# Altium PCB Panel.PcbDoc (part 1 of 2)
Units mil, origin at the board's own origin, x right, y up, seen from the top; angles counter-clockwise.
Board outline 2975 x 8550 mil, 2 copper layers (Top Layer, Bottom Layer); 208 components, 76 nets, 352 pads, 184 vias.
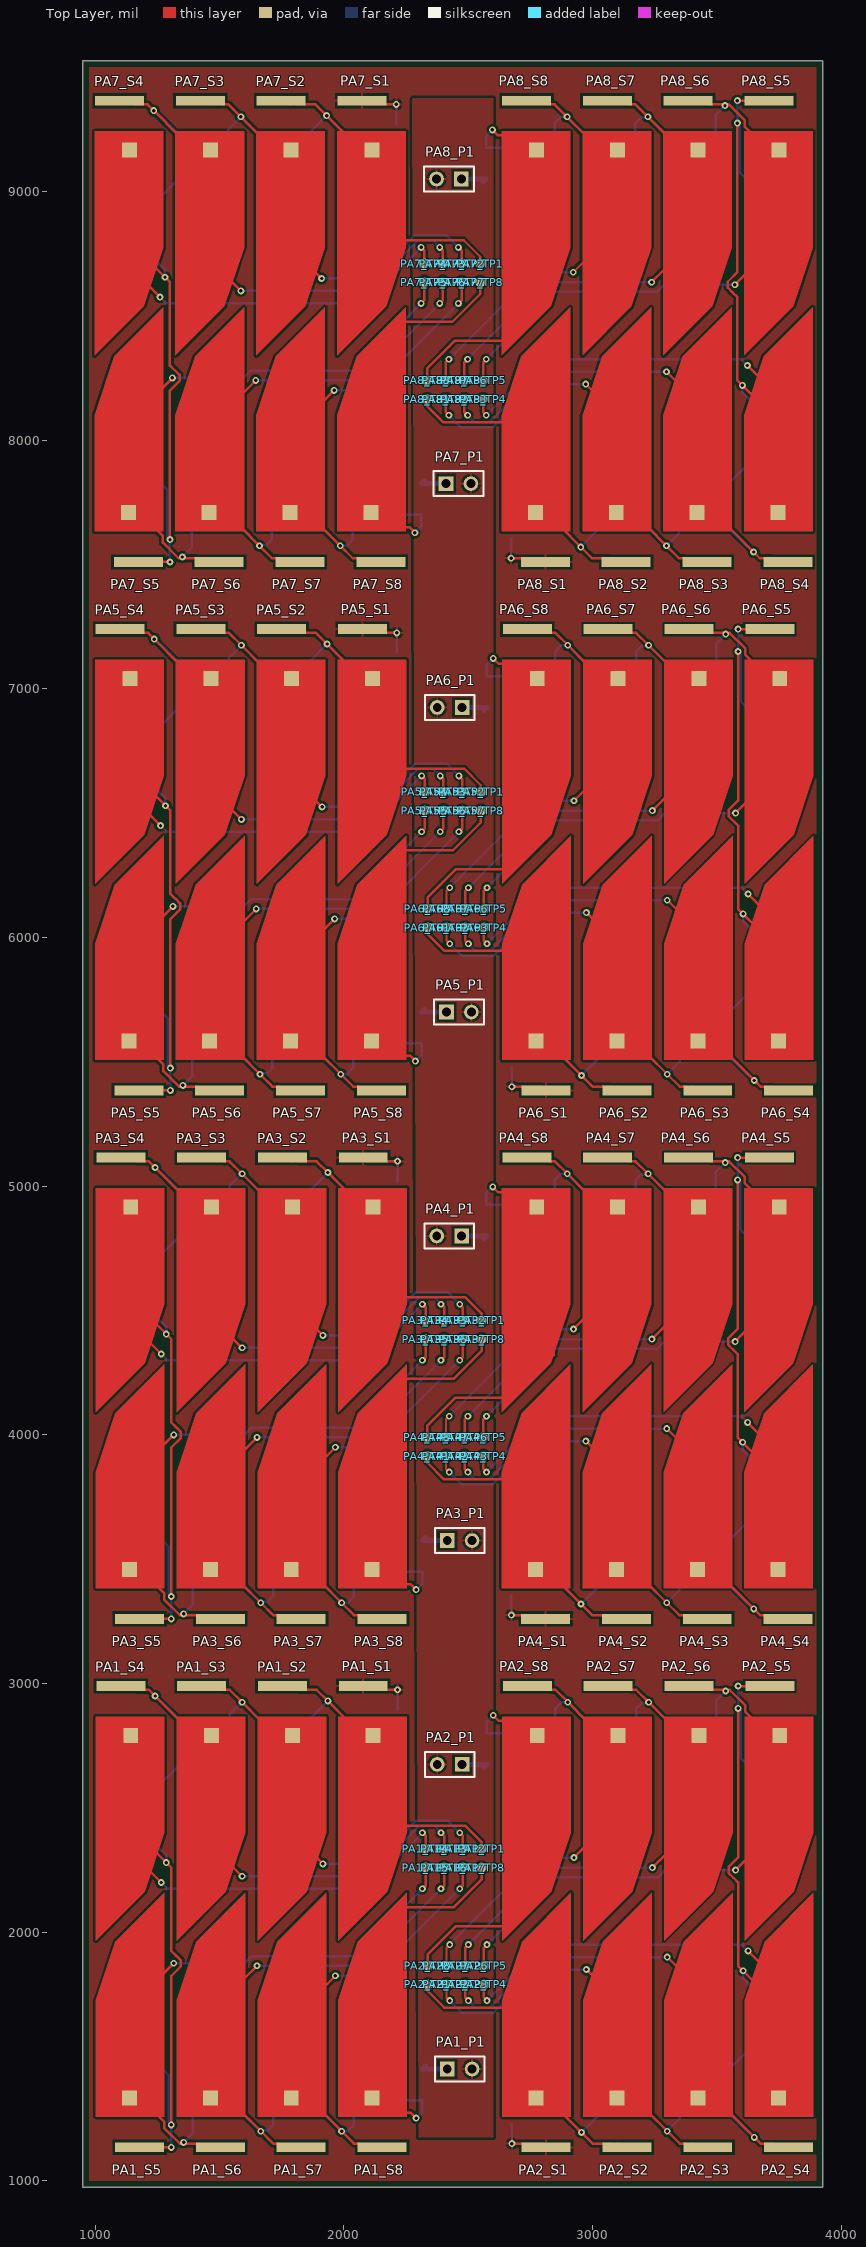
[diagram p0: Top Layer view]
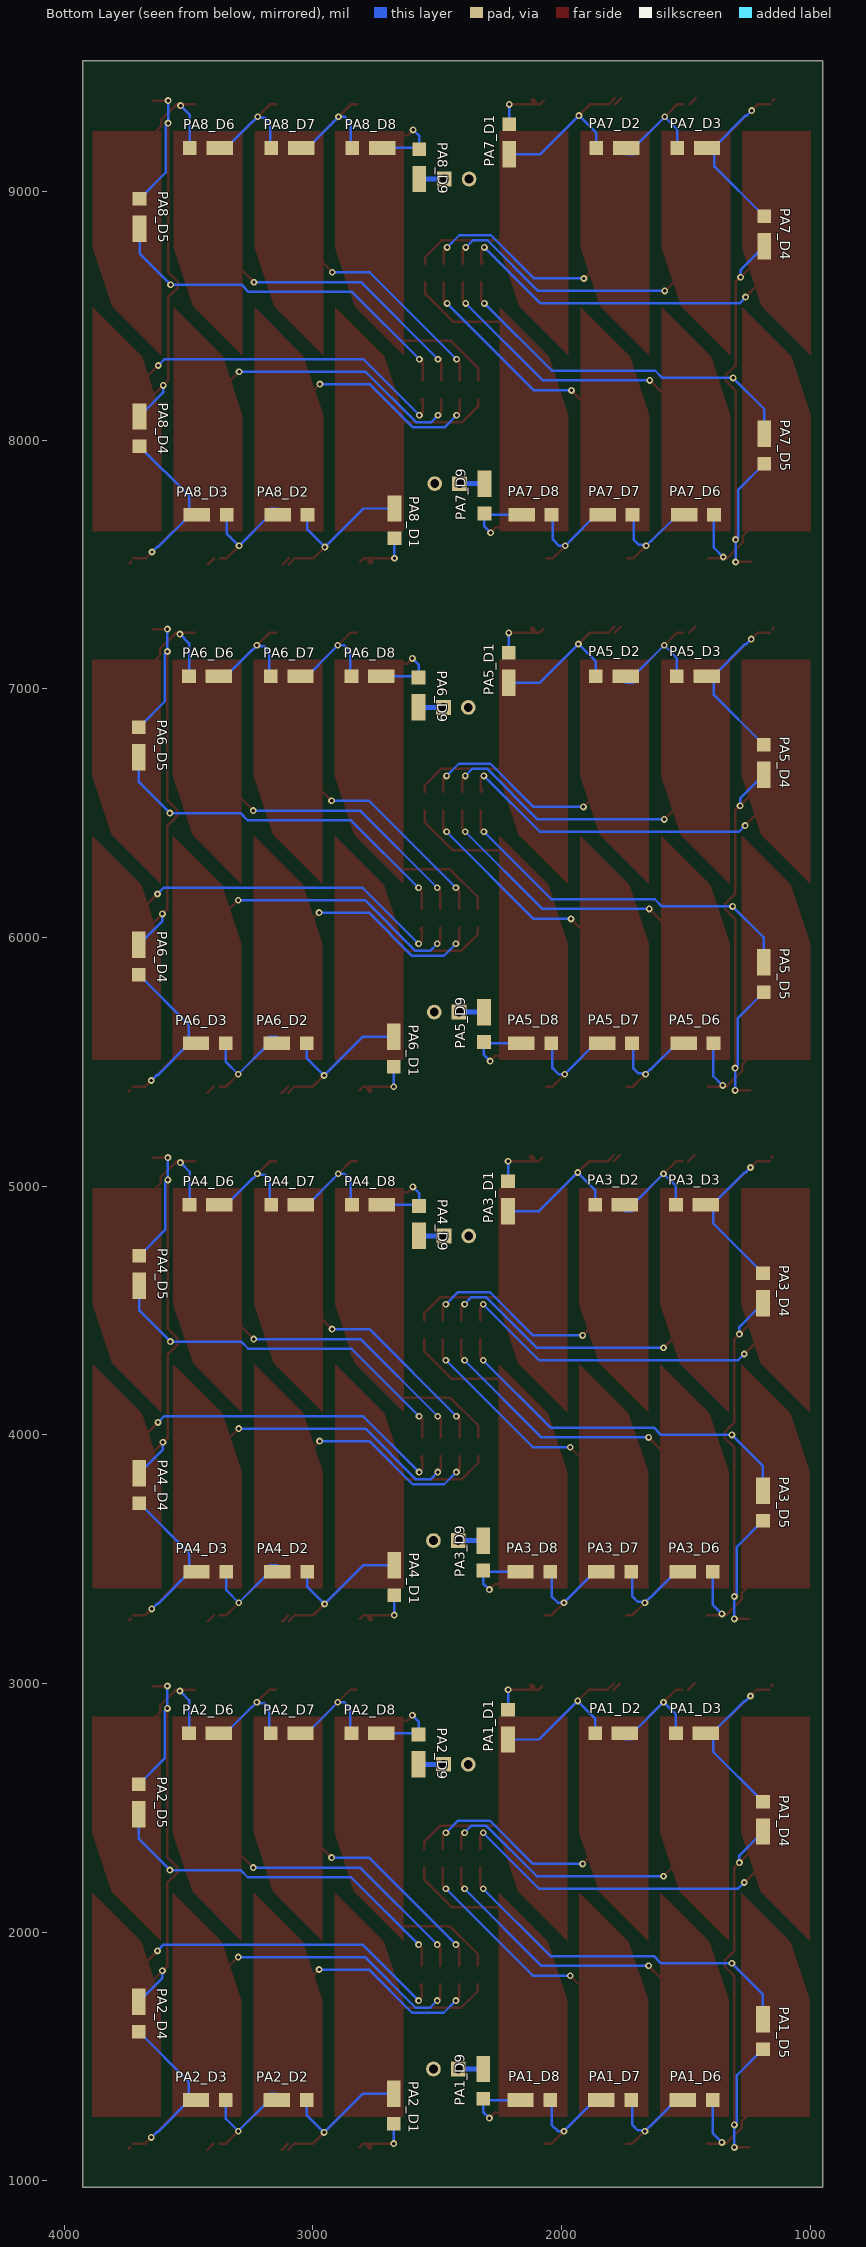
[diagram p1: Bottom Layer view, seen from below]

## Layer stack, top to bottom
Top Solder: solder mask 0.4, Solder Resist, Dk 3.5
Top Layer: signal copper 1.4
Dielectric 1: dielectric 12.6, FR-4, Dk 4.8
Bottom Layer: signal copper 1.4
Bottom Solder: solder mask 0.4, Solder Resist, Dk 3.5

## Board outline
950,9525 950,975 3925,975 3925,1000 3925,9525

## Design rules (kind name [scope] priority, off if disabled: settings)
Clearance [All] p1: gap=10 ignorepadtopadclearanceinfootprint=TRUE except(0: Arc-Hole Track-Hole SMDPad-Hole THPad-Hole Via-Hole Fill-Hole Poly-Hole Region-Hole Text-Hole)
ComponentClearance [All] p1: gap=0 collisioncheckmode=3 verticalgap=0 showdistances=FALSE
PolygonConnect [All] p1: connectstyle=Relief reliefconductorwidth=10 reliefentries=4 polygonreliefangle="90 Angle" airgapwidth=10
RoomDefinition PA1 [InComponentClass('PA1')] p1: confinementstyle=ConfineIn formatcopy=FALSE lockcomponents=FALSE outline 1000,1955.08 1000,3125 2271.45,3125 2271.45,3027.8 2271.58,2460 2600.22,2460 2600.22,2150 2273.92,1955.08 2273.92,1526 2600.22,1524.78 2600.22,1223 2273.92,1223 2273.92,1000 1002.47,1000 1002.47,1955.08
RoomDefinition PA3 [InComponentClass('PA3')] p2: confinementstyle=ConfineIn formatcopy=FALSE lockcomponents=FALSE outline 1000,4080.08 1000,5250 2271.45,5250 2271.45,5152.8 2271.58,4585 2600.22,4585 2600.22,4275 2273.92,4080.08 2273.92,3651 2600.22,3649.78 2600.22,3348 2273.92,3348 2273.92,3125 1002.47,3125 1002.47,4080.08
RoomDefinition PA8 [InComponentClass('PA8')] p3: confinementstyle=ConfineIn formatcopy=TRUE lockcomponents=FALSE outline 3887.22,8544.92 3887.22,7375 2615.78,7375 2615.78,7472.2 2615.65,8040 2287,8040 2287,8350 2613.31,8544.92 2613.31,8974 2287,8975.23 2287,9277 2613.31,9277 2613.31,9500 3884.75,9500 3884.75,8544.92
RoomDefinition PA7 [InComponentClass('PA7')] p4: confinementstyle=ConfineIn formatcopy=FALSE lockcomponents=FALSE outline 995,8330.08 995,9500 2266.45,9500 2266.45,9402.8 2266.58,8835 2595.22,8835 2595.22,8525 2268.92,8330.08 2268.92,7901 2595.22,7899.77 2595.22,7598 2268.92,7598 2268.92,7375 997.47,7375 997.47,8330.08
RoomDefinition PA6 [InComponentClass('PA6')] p5: confinementstyle=ConfineIn formatcopy=TRUE lockcomponents=FALSE outline 3890.22,6419.92 3890.22,5250 2618.78,5250 2618.78,5347.2 2618.65,5915 2290,5915 2290,6225 2616.31,6419.92 2616.31,6849 2290,6850.23 2290,7152 2616.31,7152 2616.31,7375 3887.75,7375 3887.75,6419.92
RoomDefinition PA5 [InComponentClass('PA5')] p6: confinementstyle=ConfineIn formatcopy=FALSE lockcomponents=FALSE outline 997,6205.08 997,7375 2268.45,7375 2268.45,7277.8 2268.58,6710 2597.22,6710 2597.22,6400 2270.92,6205.08 2270.92,5776 2597.22,5774.77 2597.22,5473 2270.92,5473 2270.92,5250 999.47,5250 999.47,6205.08
RoomDefinition PA4 [InComponentClass('PA4')] p7: confinementstyle=ConfineIn formatcopy=TRUE lockcomponents=FALSE outline 3888.22,4294.92 3888.22,3125 2616.78,3125 2616.78,3222.2 2616.65,3790 2288,3790 2288,4100 2614.31,4294.92 2614.31,4724 2288,4725.23 2288,5027 2614.31,5027 2614.31,5250 3885.75,5250 3885.75,4294.92
RoomDefinition PA2 [InComponentClass('PA2')] p8: confinementstyle=ConfineIn formatcopy=TRUE lockcomponents=FALSE outline 3890.22,2169.92 3890.22,1000 2618.78,1000 2618.78,1097.2 2618.65,1665 2290,1665 2290,1975 2616.31,2169.92 2616.31,2599 2290,2600.22 2290,2902 2616.31,2902 2616.31,3125 3887.75,3125 3887.75,2169.92
RoutingVias [All] p1: holewidth=28 width=50 viastyle="Through Hole" minholewidth=28 minwidth=50 maxholewidth=28 maxwidth=50
SolderMaskExpansion [All] p1: expansion=4
Width [All] p1: maxlimit=20 minlimit=10 preferedwidth=10 minimp=50.000000 maximp=50.000000 favimp=50.000000
29 further rules are at their usual default settings.

## Classes and differential pairs
component class PA8: PA8_D1 PA8_D2 PA8_D3 PA8_D4 PA8_D5 PA8_D6 PA8_D7 PA8_D8 PA8_D9 PA8_P1 PA8_S1 PA8_S2 PA8_S3 PA8_S4 PA8_S5 PA8_S6 PA8_S7 PA8_S8 PA8_TP1 PA8_TP2 PA8_TP3 PA8_TP4 PA8_TP5 PA8_TP6 PA8_TP7 PA8_TP8
component class PA7: PA7_D1 PA7_D2 PA7_D3 PA7_D4 PA7_D5 PA7_D6 PA7_D7 PA7_D8 PA7_D9 PA7_P1 PA7_S1 PA7_S2 PA7_S3 PA7_S4 PA7_S5 PA7_S6 PA7_S7 PA7_S8 PA7_TP1 PA7_TP2 PA7_TP3 PA7_TP4 PA7_TP5 PA7_TP6 PA7_TP7 PA7_TP8
component class PA6: PA6_D1 PA6_D2 PA6_D3 PA6_D4 PA6_D5 PA6_D6 PA6_D7 PA6_D8 PA6_D9 PA6_P1 PA6_S1 PA6_S2 PA6_S3 PA6_S4 PA6_S5 PA6_S6 PA6_S7 PA6_S8 PA6_TP1 PA6_TP2 PA6_TP3 PA6_TP4 PA6_TP5 PA6_TP6 PA6_TP7 PA6_TP8
channel class Row: PA1 PA2 PA3 PA4 PA5 PA6 PA7 PA8 PA9 PA10 PA11 PA12
component class PA5: PA5_D1 PA5_D2 PA5_D3 PA5_D4 PA5_D5 PA5_D6 PA5_D7 PA5_D8 PA5_D9 PA5_P1 PA5_S1 PA5_S2 PA5_S3 PA5_S4 PA5_S5 PA5_S6 PA5_S7 PA5_S8 PA5_TP1 PA5_TP2 PA5_TP3 PA5_TP4 PA5_TP5 PA5_TP6 PA5_TP7 PA5_TP8
component class PA4: PA4_D1 PA4_D2 PA4_D3 PA4_D4 PA4_D5 PA4_D6 PA4_D7 PA4_D8 PA4_D9 PA4_P1 PA4_S1 PA4_S2 PA4_S3 PA4_S4 PA4_S5 PA4_S6 PA4_S7 PA4_S8 PA4_TP1 PA4_TP2 PA4_TP3 PA4_TP4 PA4_TP5 PA4_TP6 PA4_TP7 PA4_TP8
component class PA3: PA3_D1 PA3_D2 PA3_D3 PA3_D4 PA3_D5 PA3_D6 PA3_D7 PA3_D8 PA3_D9 PA3_P1 PA3_S1 PA3_S2 PA3_S3 PA3_S4 PA3_S5 PA3_S6 PA3_S7 PA3_S8 PA3_TP1 PA3_TP2 PA3_TP3 PA3_TP4 PA3_TP5 PA3_TP6 PA3_TP7 PA3_TP8
component class PA2: PA2_D1 PA2_D2 PA2_D3 PA2_D4 PA2_D5 PA2_D6 PA2_D7 PA2_D8 PA2_D9 PA2_P1 PA2_S1 PA2_S2 PA2_S3 PA2_S4 PA2_S5 PA2_S6 PA2_S7 PA2_S8 PA2_TP1 PA2_TP2 PA2_TP3 PA2_TP4 PA2_TP5 PA2_TP6 PA2_TP7 PA2_TP8
component class PA1: PA1_D1 PA1_D2 PA1_D3 PA1_D4 PA1_D5 PA1_D6 PA1_D7 PA1_D8 PA1_D9 PA1_P1 PA1_S1 PA1_S2 PA1_S3 PA1_S4 PA1_S5 PA1_S6 PA1_S7 PA1_S8 PA1_TP1 PA1_TP2 PA1_TP3 PA1_TP4 PA1_TP5 PA1_TP6 PA1_TP7 PA1_TP8

## Components (designator, comment, footprint, x,y, rotation, side; value= is the part's Value field where it differs from the comment)
PA1_D1 "SCHOTTKY_DIODE_B120-FDICT-NDSCHOTTKY_DIODE_B120-FDICT-ND" SB_DIODE 2215.22,2822.24 r90 bottom (schematic designator D1)
PA1_D2 "SCHOTTKY_DIODE_B120-FDICT-NDSCHOTTKY_DIODE_B120-FDICT-ND" SB_DIODE 1792.39,2800 r0 bottom (schematic designator D2)
PA1_D3 "SCHOTTKY_DIODE_B120-FDICT-NDSCHOTTKY_DIODE_B120-FDICT-ND" SB_DIODE 1467.39,2800 r0 bottom (schematic designator D3)
PA1_D4 "SCHOTTKY_DIODE_B120-FDICT-NDSCHOTTKY_DIODE_B120-FDICT-ND" SB_DIODE 1190.22,2452.17 r90 bottom (schematic designator D4)
PA1_D5 "SCHOTTKY_DIODE_B120-FDICT-NDSCHOTTKY_DIODE_B120-FDICT-ND" SB_DIODE 1190.22,1602.76 r270 bottom (schematic designator D5)
PA1_D6 "SCHOTTKY_DIODE_B120-FDICT-NDSCHOTTKY_DIODE_B120-FDICT-ND" SB_DIODE 1465.22,1325 r180 bottom (schematic designator D6)
PA1_D7 "SCHOTTKY_DIODE_B120-FDICT-NDSCHOTTKY_DIODE_B120-FDICT-ND" SB_DIODE 1792.98,1325 r180 bottom (schematic designator D7)
PA1_D8 "SCHOTTKY_DIODE_B120-FDICT-NDSCHOTTKY_DIODE_B120-FDICT-ND" SB_DIODE 2117.99,1325 r180 bottom (schematic designator D8)
PA1_D9 "SCHOTTKY_DIODE_B120-FDICT-NDSCHOTTKY_DIODE_B120-FDICT-ND" SB_DIODE 2315.22,1402.76 r270 bottom (schematic designator D9)
PA1_P1 "Header 2" HDR1X2 2415.22,1450 r0 top (schematic designator P1)
PA1_S1 "SOLAR_CELL" SOLAR_CELL 1977.42,1966.34 r0 top (schematic designator S1)
PA1_S2 "SOLAR_CELL" SOLAR_CELL 1652.42,1966.34 r0 top (schematic designator S2)
PA1_S3 "SOLAR_CELL" SOLAR_CELL 1327.42,1966.34 r0 top (schematic designator S3)
PA1_S4 "SOLAR_CELL" SOLAR_CELL 1002.42,1966.34 r0 top (schematic designator S4)
PA1_S5 "SOLAR_CELL" SOLAR_CELL 1278.03,2158.66 r180 top (schematic designator S5)
PA1_S6 "SOLAR_CELL" SOLAR_CELL 1603.03,2158.66 r180 top (schematic designator S6)
PA1_S7 "SOLAR_CELL" SOLAR_CELL 1928.03,2158.66 r180 top (schematic designator S7)
PA1_S8 "SOLAR_CELL" SOLAR_CELL 2253.03,2158.66 r180 top (schematic designator S8)
PA1_TP1 "TEST_POINT" TEST_POINT 2553.03,2335.04 r90 top (schematic designator TP1)
PA1_TP2 "TEST_POINT" TEST_POINT 2478.03,2335.04 r90 top (schematic designator TP2)
PA1_TP3 "TEST_POINT" TEST_POINT 2403.03,2335.04 r90 top (schematic designator TP3)
PA1_TP4 "TEST_POINT" TEST_POINT 2328.03,2335.04 r90 top (schematic designator TP4)
PA1_TP5 "TEST_POINT" TEST_POINT 2328.03,2260.04 r90 top (schematic designator TP5)
PA1_TP6 "TEST_POINT" TEST_POINT 2403.03,2260.04 r90 top (schematic designator TP6)
PA1_TP7 "TEST_POINT" TEST_POINT 2478.03,2260.04 r90 top (schematic designator TP7)
PA1_TP8 "TEST_POINT" TEST_POINT 2553.03,2260.04 r90 top (schematic designator TP8)
PA2_D1 "SCHOTTKY_DIODE_B120-FDICT-NDSCHOTTKY_DIODE_B120-FDICT-ND" SB_DIODE 2675,1302.76 r270 bottom (schematic designator D1)
PA2_D2 "SCHOTTKY_DIODE_B120-FDICT-NDSCHOTTKY_DIODE_B120-FDICT-ND" SB_DIODE 3097.83,1325 r180 bottom (schematic designator D2)
PA2_D3 "SCHOTTKY_DIODE_B120-FDICT-NDSCHOTTKY_DIODE_B120-FDICT-ND" SB_DIODE 3422.83,1325 r180 bottom (schematic designator D3)
PA2_D4 "SCHOTTKY_DIODE_B120-FDICT-NDSCHOTTKY_DIODE_B120-FDICT-ND" SB_DIODE 3700,1672.83 r270 bottom (schematic designator D4)
PA2_D5 "SCHOTTKY_DIODE_B120-FDICT-NDSCHOTTKY_DIODE_B120-FDICT-ND" SB_DIODE 3700,2522.24 r90 bottom (schematic designator D5)
PA2_D6 "SCHOTTKY_DIODE_B120-FDICT-NDSCHOTTKY_DIODE_B120-FDICT-ND" SB_DIODE 3425,2800 r0 bottom (schematic designator D6)
PA2_D7 "SCHOTTKY_DIODE_B120-FDICT-NDSCHOTTKY_DIODE_B120-FDICT-ND" SB_DIODE 3097.24,2800 r0 bottom (schematic designator D7)
PA2_D8 "SCHOTTKY_DIODE_B120-FDICT-NDSCHOTTKY_DIODE_B120-FDICT-ND" SB_DIODE 2772.24,2800 r0 bottom (schematic designator D8)
PA2_D9 "SCHOTTKY_DIODE_B120-FDICT-NDSCHOTTKY_DIODE_B120-FDICT-ND" SB_DIODE 2575,2722.24 r90 bottom (schematic designator D9)
PA2_P1 "Header 2" HDR1X2 2475,2675 r180 top (schematic designator P1)
PA2_S1 "SOLAR_CELL" SOLAR_CELL 2912.8,2158.66 r180 top (schematic designator S1)
PA2_S2 "SOLAR_CELL" SOLAR_CELL 3237.8,2158.66 r180 top (schematic designator S2)
PA2_S3 "SOLAR_CELL" SOLAR_CELL 3562.8,2158.66 r180 top (schematic designator S3)
PA2_S4 "SOLAR_CELL" SOLAR_CELL 3887.8,2158.66 r180 top (schematic designator S4)
PA2_S5 "SOLAR_CELL" SOLAR_CELL 3612.2,1966.34 r0 top (schematic designator S5)
PA2_S6 "SOLAR_CELL" SOLAR_CELL 3287.2,1966.34 r0 top (schematic designator S6)
PA2_S7 "SOLAR_CELL" SOLAR_CELL 2962.2,1966.34 r0 top (schematic designator S7)
PA2_S8 "SOLAR_CELL" SOLAR_CELL 2637.2,1966.34 r0 top (schematic designator S8)
PA2_TP1 "TEST_POINT" TEST_POINT 2337.2,1789.96 r270 top (schematic designator TP1)
PA2_TP2 "TEST_POINT" TEST_POINT 2412.2,1789.96 r270 top (schematic designator TP2)
PA2_TP3 "TEST_POINT" TEST_POINT 2487.2,1789.96 r270 top (schematic designator TP3)
PA2_TP4 "TEST_POINT" TEST_POINT 2562.2,1789.96 r270 top (schematic designator TP4)
PA2_TP5 "TEST_POINT" TEST_POINT 2562.2,1864.96 r270 top (schematic designator TP5)
PA2_TP6 "TEST_POINT" TEST_POINT 2487.2,1864.96 r270 top (schematic designator TP6)
PA2_TP7 "TEST_POINT" TEST_POINT 2412.2,1864.96 r270 top (schematic designator TP7)
PA2_TP8 "TEST_POINT" TEST_POINT 2337.2,1864.96 r270 top (schematic designator TP8)
PA3_D1 "SCHOTTKY_DIODE_B120-FDICT-NDSCHOTTKY_DIODE_B120-FDICT-ND" SB_DIODE 2215.22,4947.24 r90 bottom (schematic designator D1)
PA3_D2 "SCHOTTKY_DIODE_B120-FDICT-NDSCHOTTKY_DIODE_B120-FDICT-ND" SB_DIODE 1792.39,4925 r0 bottom (schematic designator D2)
PA3_D3 "SCHOTTKY_DIODE_B120-FDICT-NDSCHOTTKY_DIODE_B120-FDICT-ND" SB_DIODE 1467.39,4925 r0 bottom (schematic designator D3)
PA3_D4 "SCHOTTKY_DIODE_B120-FDICT-NDSCHOTTKY_DIODE_B120-FDICT-ND" SB_DIODE 1190.22,4577.17 r90 bottom (schematic designator D4)
PA3_D5 "SCHOTTKY_DIODE_B120-FDICT-NDSCHOTTKY_DIODE_B120-FDICT-ND" SB_DIODE 1190.22,3727.76 r270 bottom (schematic designator D5)
PA3_D6 "SCHOTTKY_DIODE_B120-FDICT-NDSCHOTTKY_DIODE_B120-FDICT-ND" SB_DIODE 1465.22,3450 r180 bottom (schematic designator D6)
PA3_D7 "SCHOTTKY_DIODE_B120-FDICT-NDSCHOTTKY_DIODE_B120-FDICT-ND" SB_DIODE 1792.98,3450 r180 bottom (schematic designator D7)
PA3_D8 "SCHOTTKY_DIODE_B120-FDICT-NDSCHOTTKY_DIODE_B120-FDICT-ND" SB_DIODE 2117.99,3450 r180 bottom (schematic designator D8)
PA3_D9 "SCHOTTKY_DIODE_B120-FDICT-NDSCHOTTKY_DIODE_B120-FDICT-ND" SB_DIODE 2315.22,3527.76 r270 bottom (schematic designator D9)
PA3_P1 "Header 2" HDR1X2 2415.22,3575 r0 top (schematic designator P1)
PA3_S1 "SOLAR_CELL" SOLAR_CELL 1977.42,4091.34 r0 top (schematic designator S1)
PA3_S2 "SOLAR_CELL" SOLAR_CELL 1652.42,4091.34 r0 top (schematic designator S2)
PA3_S3 "SOLAR_CELL" SOLAR_CELL 1327.42,4091.34 r0 top (schematic designator S3)
PA3_S4 "SOLAR_CELL" SOLAR_CELL 1002.42,4091.34 r0 top (schematic designator S4)
PA3_S5 "SOLAR_CELL" SOLAR_CELL 1278.03,4283.66 r180 top (schematic designator S5)
PA3_S6 "SOLAR_CELL" SOLAR_CELL 1603.03,4283.66 r180 top (schematic designator S6)
PA3_S7 "SOLAR_CELL" SOLAR_CELL 1928.03,4283.66 r180 top (schematic designator S7)
PA3_S8 "SOLAR_CELL" SOLAR_CELL 2253.03,4283.66 r180 top (schematic designator S8)
PA3_TP1 "TEST_POINT" TEST_POINT 2553.03,4460.04 r90 top (schematic designator TP1)
PA3_TP2 "TEST_POINT" TEST_POINT 2478.03,4460.04 r90 top (schematic designator TP2)
PA3_TP3 "TEST_POINT" TEST_POINT 2403.03,4460.04 r90 top (schematic designator TP3)
PA3_TP4 "TEST_POINT" TEST_POINT 2328.03,4460.04 r90 top (schematic designator TP4)
PA3_TP5 "TEST_POINT" TEST_POINT 2328.03,4385.04 r90 top (schematic designator TP5)
PA3_TP6 "TEST_POINT" TEST_POINT 2403.03,4385.04 r90 top (schematic designator TP6)
PA3_TP7 "TEST_POINT" TEST_POINT 2478.03,4385.04 r90 top (schematic designator TP7)
PA3_TP8 "TEST_POINT" TEST_POINT 2553.03,4385.04 r90 top (schematic designator TP8)
PA4_D1 "SCHOTTKY_DIODE_B120-FDICT-NDSCHOTTKY_DIODE_B120-FDICT-ND" SB_DIODE 2673,3427.76 r270 bottom (schematic designator D1)
PA4_D2 "SCHOTTKY_DIODE_B120-FDICT-NDSCHOTTKY_DIODE_B120-FDICT-ND" SB_DIODE 3095.83,3450 r180 bottom (schematic designator D2)
PA4_D3 "SCHOTTKY_DIODE_B120-FDICT-NDSCHOTTKY_DIODE_B120-FDICT-ND" SB_DIODE 3420.83,3450 r180 bottom (schematic designator D3)
PA4_D4 "SCHOTTKY_DIODE_B120-FDICT-NDSCHOTTKY_DIODE_B120-FDICT-ND" SB_DIODE 3698,3797.83 r270 bottom (schematic designator D4)
PA4_D5 "SCHOTTKY_DIODE_B120-FDICT-NDSCHOTTKY_DIODE_B120-FDICT-ND" SB_DIODE 3698,4647.24 r90 bottom (schematic designator D5)
PA4_D6 "SCHOTTKY_DIODE_B120-FDICT-NDSCHOTTKY_DIODE_B120-FDICT-ND" SB_DIODE 3423,4925 r0 bottom (schematic designator D6)
PA4_D7 "SCHOTTKY_DIODE_B120-FDICT-NDSCHOTTKY_DIODE_B120-FDICT-ND" SB_DIODE 3095.24,4925 r0 bottom (schematic designator D7)
PA4_D8 "SCHOTTKY_DIODE_B120-FDICT-NDSCHOTTKY_DIODE_B120-FDICT-ND" SB_DIODE 2770.24,4925 r0 bottom (schematic designator D8)
PA4_D9 "SCHOTTKY_DIODE_B120-FDICT-NDSCHOTTKY_DIODE_B120-FDICT-ND" SB_DIODE 2573,4847.24 r90 bottom (schematic designator D9)
PA4_P1 "Header 2" HDR1X2 2473,4800 r180 top (schematic designator P1)
PA4_S1 "SOLAR_CELL" SOLAR_CELL 2910.8,4283.66 r180 top (schematic designator S1)
PA4_S2 "SOLAR_CELL" SOLAR_CELL 3235.8,4283.66 r180 top (schematic designator S2)
PA4_S3 "SOLAR_CELL" SOLAR_CELL 3560.8,4283.66 r180 top (schematic designator S3)
PA4_S4 "SOLAR_CELL" SOLAR_CELL 3885.8,4283.66 r180 top (schematic designator S4)
PA4_S5 "SOLAR_CELL" SOLAR_CELL 3610.2,4091.34 r0 top (schematic designator S5)
PA4_S6 "SOLAR_CELL" SOLAR_CELL 3285.2,4091.34 r0 top (schematic designator S6)
PA4_S7 "SOLAR_CELL" SOLAR_CELL 2960.2,4091.34 r0 top (schematic designator S7)
PA4_S8 "SOLAR_CELL" SOLAR_CELL 2635.2,4091.34 r0 top (schematic designator S8)
PA4_TP1 "TEST_POINT" TEST_POINT 2335.2,3914.96 r270 top (schematic designator TP1)
PA4_TP2 "TEST_POINT" TEST_POINT 2410.2,3914.96 r270 top (schematic designator TP2)
PA4_TP3 "TEST_POINT" TEST_POINT 2485.2,3914.96 r270 top (schematic designator TP3)
PA4_TP4 "TEST_POINT" TEST_POINT 2560.2,3914.96 r270 top (schematic designator TP4)
PA4_TP5 "TEST_POINT" TEST_POINT 2560.2,3989.96 r270 top (schematic designator TP5)
PA4_TP6 "TEST_POINT" TEST_POINT 2485.2,3989.96 r270 top (schematic designator TP6)
PA4_TP7 "TEST_POINT" TEST_POINT 2410.2,3989.96 r270 top (schematic designator TP7)
PA4_TP8 "TEST_POINT" TEST_POINT 2335.2,3989.96 r270 top (schematic designator TP8)
PA5_D1 "SCHOTTKY_DIODE_B120-FDICT-NDSCHOTTKY_DIODE_B120-FDICT-ND" SB_DIODE 2212.22,7072.24 r90 bottom (schematic designator D1)
PA5_D2 "SCHOTTKY_DIODE_B120-FDICT-NDSCHOTTKY_DIODE_B120-FDICT-ND" SB_DIODE 1789.39,7050 r0 bottom (schematic designator D2)
PA5_D3 "SCHOTTKY_DIODE_B120-FDICT-NDSCHOTTKY_DIODE_B120-FDICT-ND" SB_DIODE 1464.39,7050 r0 bottom (schematic designator D3)
PA5_D4 "SCHOTTKY_DIODE_B120-FDICT-NDSCHOTTKY_DIODE_B120-FDICT-ND" SB_DIODE 1187.22,6702.17 r90 bottom (schematic designator D4)
PA5_D5 "SCHOTTKY_DIODE_B120-FDICT-NDSCHOTTKY_DIODE_B120-FDICT-ND" SB_DIODE 1187.22,5852.76 r270 bottom (schematic designator D5)
PA5_D6 "SCHOTTKY_DIODE_B120-FDICT-NDSCHOTTKY_DIODE_B120-FDICT-ND" SB_DIODE 1462.22,5575 r180 bottom (schematic designator D6)
PA5_D7 "SCHOTTKY_DIODE_B120-FDICT-NDSCHOTTKY_DIODE_B120-FDICT-ND" SB_DIODE 1789.98,5575 r180 bottom (schematic designator D7)
PA5_D8 "SCHOTTKY_DIODE_B120-FDICT-NDSCHOTTKY_DIODE_B120-FDICT-ND" SB_DIODE 2114.99,5575 r180 bottom (schematic designator D8)
PA5_D9 "SCHOTTKY_DIODE_B120-FDICT-NDSCHOTTKY_DIODE_B120-FDICT-ND" SB_DIODE 2312.22,5652.76 r270 bottom (schematic designator D9)
PA5_P1 "Header 2" HDR1X2 2412.22,5700 r0 top (schematic designator P1)
PA5_S1 "SOLAR_CELL" SOLAR_CELL 1974.42,6216.34 r0 top (schematic designator S1)
PA5_S2 "SOLAR_CELL" SOLAR_CELL 1649.42,6216.34 r0 top (schematic designator S2)
PA5_S3 "SOLAR_CELL" SOLAR_CELL 1324.42,6216.34 r0 top (schematic designator S3)
PA5_S4 "SOLAR_CELL" SOLAR_CELL 999.42,6216.34 r0 top (schematic designator S4)
PA5_S5 "SOLAR_CELL" SOLAR_CELL 1275.03,6408.66 r180 top (schematic designator S5)
PA5_S6 "SOLAR_CELL" SOLAR_CELL 1600.03,6408.66 r180 top (schematic designator S6)
PA5_S7 "SOLAR_CELL" SOLAR_CELL 1925.03,6408.66 r180 top (schematic designator S7)
PA5_S8 "SOLAR_CELL" SOLAR_CELL 2250.03,6408.66 r180 top (schematic designator S8)
PA5_TP1 "TEST_POINT" TEST_POINT 2550.03,6585.04 r90 top (schematic designator TP1)
PA5_TP2 "TEST_POINT" TEST_POINT 2475.03,6585.04 r90 top (schematic designator TP2)
PA5_TP3 "TEST_POINT" TEST_POINT 2400.03,6585.04 r90 top (schematic designator TP3)
PA5_TP4 "TEST_POINT" TEST_POINT 2325.03,6585.04 r90 top (schematic designator TP4)
PA5_TP5 "TEST_POINT" TEST_POINT 2325.03,6510.04 r90 top (schematic designator TP5)
PA5_TP6 "TEST_POINT" TEST_POINT 2400.03,6510.04 r90 top (schematic designator TP6)
PA5_TP7 "TEST_POINT" TEST_POINT 2475.03,6510.04 r90 top (schematic designator TP7)
PA5_TP8 "TEST_POINT" TEST_POINT 2550.03,6510.04 r90 top (schematic designator TP8)
PA6_D1 "SCHOTTKY_DIODE_B120-FDICT-NDSCHOTTKY_DIODE_B120-FDICT-ND" SB_DIODE 2675,5552.76 r270 bottom (schematic designator D1)
PA6_D2 "SCHOTTKY_DIODE_B120-FDICT-NDSCHOTTKY_DIODE_B120-FDICT-ND" SB_DIODE 3097.83,5575 r180 bottom (schematic designator D2)
PA6_D3 "SCHOTTKY_DIODE_B120-FDICT-NDSCHOTTKY_DIODE_B120-FDICT-ND" SB_DIODE 3422.83,5575 r180 bottom (schematic designator D3)
PA6_D4 "SCHOTTKY_DIODE_B120-FDICT-NDSCHOTTKY_DIODE_B120-FDICT-ND" SB_DIODE 3700,5922.83 r270 bottom (schematic designator D4)
PA6_D5 "SCHOTTKY_DIODE_B120-FDICT-NDSCHOTTKY_DIODE_B120-FDICT-ND" SB_DIODE 3700,6772.24 r90 bottom (schematic designator D5)
PA6_D6 "SCHOTTKY_DIODE_B120-FDICT-NDSCHOTTKY_DIODE_B120-FDICT-ND" SB_DIODE 3425,7050 r0 bottom (schematic designator D6)
PA6_D7 "SCHOTTKY_DIODE_B120-FDICT-NDSCHOTTKY_DIODE_B120-FDICT-ND" SB_DIODE 3097.24,7050 r0 bottom (schematic designator D7)
PA6_D8 "SCHOTTKY_DIODE_B120-FDICT-NDSCHOTTKY_DIODE_B120-FDICT-ND" SB_DIODE 2772.24,7050 r0 bottom (schematic designator D8)
PA6_D9 "SCHOTTKY_DIODE_B120-FDICT-NDSCHOTTKY_DIODE_B120-FDICT-ND" SB_DIODE 2575,6972.24 r90 bottom (schematic designator D9)
PA6_P1 "Header 2" HDR1X2 2475,6925 r180 top (schematic designator P1)
PA6_S1 "SOLAR_CELL" SOLAR_CELL 2912.8,6408.66 r180 top (schematic designator S1)
PA6_S2 "SOLAR_CELL" SOLAR_CELL 3237.8,6408.66 r180 top (schematic designator S2)
PA6_S3 "SOLAR_CELL" SOLAR_CELL 3562.8,6408.66 r180 top (schematic designator S3)
PA6_S4 "SOLAR_CELL" SOLAR_CELL 3887.8,6408.66 r180 top (schematic designator S4)
PA6_S5 "SOLAR_CELL" SOLAR_CELL 3612.2,6216.34 r0 top (schematic designator S5)
PA6_S6 "SOLAR_CELL" SOLAR_CELL 3287.2,6216.34 r0 top (schematic designator S6)
PA6_S7 "SOLAR_CELL" SOLAR_CELL 2962.2,6216.34 r0 top (schematic designator S7)
PA6_S8 "SOLAR_CELL" SOLAR_CELL 2637.2,6216.34 r0 top (schematic designator S8)
PA6_TP1 "TEST_POINT" TEST_POINT 2337.2,6039.96 r270 top (schematic designator TP1)
PA6_TP2 "TEST_POINT" TEST_POINT 2412.2,6039.96 r270 top (schematic designator TP2)
PA6_TP3 "TEST_POINT" TEST_POINT 2487.2,6039.96 r270 top (schematic designator TP3)
PA6_TP4 "TEST_POINT" TEST_POINT 2562.2,6039.96 r270 top (schematic designator TP4)
PA6_TP5 "TEST_POINT" TEST_POINT 2562.2,6114.96 r270 top (schematic designator TP5)
PA6_TP6 "TEST_POINT" TEST_POINT 2487.2,6114.96 r270 top (schematic designator TP6)
PA6_TP7 "TEST_POINT" TEST_POINT 2412.2,6114.96 r270 top (schematic designator TP7)
PA6_TP8 "TEST_POINT" TEST_POINT 2337.2,6114.96 r270 top (schematic designator TP8)
PA7_D1 "SCHOTTKY_DIODE_B120-FDICT-NDSCHOTTKY_DIODE_B120-FDICT-ND" SB_DIODE 2210.22,9197.24 r90 bottom (schematic designator D1)
PA7_D2 "SCHOTTKY_DIODE_B120-FDICT-NDSCHOTTKY_DIODE_B120-FDICT-ND" SB_DIODE 1787.39,9175 r0 bottom (schematic designator D2)
PA7_D3 "SCHOTTKY_DIODE_B120-FDICT-NDSCHOTTKY_DIODE_B120-FDICT-ND" SB_DIODE 1462.39,9175 r0 bottom (schematic designator D3)
PA7_D4 "SCHOTTKY_DIODE_B120-FDICT-NDSCHOTTKY_DIODE_B120-FDICT-ND" SB_DIODE 1185.22,8827.17 r90 bottom (schematic designator D4)
PA7_D5 "SCHOTTKY_DIODE_B120-FDICT-NDSCHOTTKY_DIODE_B120-FDICT-ND" SB_DIODE 1185.22,7977.76 r270 bottom (schematic designator D5)
PA7_D6 "SCHOTTKY_DIODE_B120-FDICT-NDSCHOTTKY_DIODE_B120-FDICT-ND" SB_DIODE 1460.22,7700 r180 bottom (schematic designator D6)
PA7_D7 "SCHOTTKY_DIODE_B120-FDICT-NDSCHOTTKY_DIODE_B120-FDICT-ND" SB_DIODE 1787.98,7700 r180 bottom (schematic designator D7)
PA7_D8 "SCHOTTKY_DIODE_B120-FDICT-NDSCHOTTKY_DIODE_B120-FDICT-ND" SB_DIODE 2112.99,7700 r180 bottom (schematic designator D8)
PA7_D9 "SCHOTTKY_DIODE_B120-FDICT-NDSCHOTTKY_DIODE_B120-FDICT-ND" SB_DIODE 2310.22,7777.76 r270 bottom (schematic designator D9)
PA7_P1 "Header 2" HDR1X2 2410.22,7825 r0 top (schematic designator P1)
PA7_S1 "SOLAR_CELL" SOLAR_CELL 1972.42,8341.34 r0 top (schematic designator S1)
PA7_S2 "SOLAR_CELL" SOLAR_CELL 1647.42,8341.34 r0 top (schematic designator S2)
PA7_S3 "SOLAR_CELL" SOLAR_CELL 1322.42,8341.34 r0 top (schematic designator S3)
PA7_S4 "SOLAR_CELL" SOLAR_CELL 997.42,8341.34 r0 top (schematic designator S4)
PA7_S5 "SOLAR_CELL" SOLAR_CELL 1273.03,8533.66 r180 top (schematic designator S5)
PA7_S6 "SOLAR_CELL" SOLAR_CELL 1598.03,8533.66 r180 top (schematic designator S6)
PA7_S7 "SOLAR_CELL" SOLAR_CELL 1923.03,8533.66 r180 top (schematic designator S7)
PA7_S8 "SOLAR_CELL" SOLAR_CELL 2248.03,8533.66 r180 top (schematic designator S8)
PA7_TP1 "TEST_POINT" TEST_POINT 2548.03,8710.04 r90 top (schematic designator TP1)
PA7_TP2 "TEST_POINT" TEST_POINT 2473.03,8710.04 r90 top (schematic designator TP2)
PA7_TP3 "TEST_POINT" TEST_POINT 2398.03,8710.04 r90 top (schematic designator TP3)
PA7_TP4 "TEST_POINT" TEST_POINT 2323.03,8710.04 r90 top (schematic designator TP4)
PA7_TP5 "TEST_POINT" TEST_POINT 2323.03,8635.04 r90 top (schematic designator TP5)
PA7_TP6 "TEST_POINT" TEST_POINT 2398.03,8635.04 r90 top (schematic designator TP6)
PA7_TP7 "TEST_POINT" TEST_POINT 2473.03,8635.04 r90 top (schematic designator TP7)
PA7_TP8 "TEST_POINT" TEST_POINT 2548.03,8635.04 r90 top (schematic designator TP8)
PA8_D1 "SCHOTTKY_DIODE_B120-FDICT-NDSCHOTTKY_DIODE_B120-FDICT-ND" SB_DIODE 2672,7677.76 r270 bottom (schematic designator D1)
PA8_D2 "SCHOTTKY_DIODE_B120-FDICT-NDSCHOTTKY_DIODE_B120-FDICT-ND" SB_DIODE 3094.83,7700 r180 bottom (schematic designator D2)
PA8_D3 "SCHOTTKY_DIODE_B120-FDICT-NDSCHOTTKY_DIODE_B120-FDICT-ND" SB_DIODE 3419.83,7700 r180 bottom (schematic designator D3)
PA8_D4 "SCHOTTKY_DIODE_B120-FDICT-NDSCHOTTKY_DIODE_B120-FDICT-ND" SB_DIODE 3697,8047.83 r270 bottom (schematic designator D4)
PA8_D5 "SCHOTTKY_DIODE_B120-FDICT-NDSCHOTTKY_DIODE_B120-FDICT-ND" SB_DIODE 3697,8897.24 r90 bottom (schematic designator D5)
PA8_D6 "SCHOTTKY_DIODE_B120-FDICT-NDSCHOTTKY_DIODE_B120-FDICT-ND" SB_DIODE 3422,9175 r0 bottom (schematic designator D6)
PA8_D7 "SCHOTTKY_DIODE_B120-FDICT-NDSCHOTTKY_DIODE_B120-FDICT-ND" SB_DIODE 3094.24,9175 r0 bottom (schematic designator D7)
PA8_D8 "SCHOTTKY_DIODE_B120-FDICT-NDSCHOTTKY_DIODE_B120-FDICT-ND" SB_DIODE 2769.24,9175 r0 bottom (schematic designator D8)
PA8_D9 "SCHOTTKY_DIODE_B120-FDICT-NDSCHOTTKY_DIODE_B120-FDICT-ND" SB_DIODE 2572,9097.24 r90 bottom (schematic designator D9)
PA8_P1 "Header 2" HDR1X2 2472,9050 r180 top (schematic designator P1)
PA8_S1 "SOLAR_CELL" SOLAR_CELL 2909.8,8533.66 r180 top (schematic designator S1)
PA8_S2 "SOLAR_CELL" SOLAR_CELL 3234.8,8533.66 r180 top (schematic designator S2)
PA8_S3 "SOLAR_CELL" SOLAR_CELL 3559.8,8533.66 r180 top (schematic designator S3)
PA8_S4 "SOLAR_CELL" SOLAR_CELL 3884.8,8533.66 r180 top (schematic designator S4)
PA8_S5 "SOLAR_CELL" SOLAR_CELL 3609.2,8341.34 r0 top (schematic designator S5)
PA8_S6 "SOLAR_CELL" SOLAR_CELL 3284.2,8341.34 r0 top (schematic designator S6)
PA8_S7 "SOLAR_CELL" SOLAR_CELL 2959.2,8341.34 r0 top (schematic designator S7)
PA8_S8 "SOLAR_CELL" SOLAR_CELL 2634.2,8341.34 r0 top (schematic designator S8)
PA8_TP1 "TEST_POINT" TEST_POINT 2334.2,8164.96 r270 top (schematic designator TP1)
PA8_TP2 "TEST_POINT" TEST_POINT 2409.2,8164.96 r270 top (schematic designator TP2)
PA8_TP3 "TEST_POINT" TEST_POINT 2484.2,8164.96 r270 top (schematic designator TP3)
PA8_TP4 "TEST_POINT" TEST_POINT 2559.2,8164.96 r270 top (schematic designator TP4)
PA8_TP5 "TEST_POINT" TEST_POINT 2559.2,8239.96 r270 top (schematic designator TP5)
PA8_TP6 "TEST_POINT" TEST_POINT 2484.2,8239.96 r270 top (schematic designator TP6)
PA8_TP7 "TEST_POINT" TEST_POINT 2409.2,8239.96 r270 top (schematic designator TP7)
PA8_TP8 "TEST_POINT" TEST_POINT 2334.2,8239.96 r270 top (schematic designator TP8)

## Footprints (in the part's own frame and the unit in brackets; to place one, negate y for a bottom-side part, rotate by r counter-clockwise, add the part's x,y. Pads: shape width x height; smd on the part's side, far side on the other; paste and mask are expansions set on the pad)
HDR1X2 [mm] "Connector; Header; 2 Position"
  rect 1.5x1.5 hole 0.9: 1(0,0)
  round 1.5 hole 0.9: 2(2.54,0)
  silkscreen extent -1.27,-1.27 3.81,1.27
SB_DIODE [mil]
  rect 106.3x55.12 smd: NEG(-47.24,0)
  rect 55.12x55.12 smd: POS(72.83,0)
SOLAR_CELL [mil]
  rect 196.85x39.37 smd: NEG(100,1023.62)
  rect 60x60 smd: POS(140,825)
  Top Layer region: 0,900 275.59,900 275.59,433.07 196.85,196.85 0,0
TEST_POINT [mil]
  round 40 smd: PAD(0,0)

## Part data
PA1_D1 PA1_D2 PA1_D3 PA1_D4 PA1_D5 PA1_D6 PA1_D7 PA1_D8 PA1_D9 PA2_D1 PA2_D2 PA2_D3 PA2_D4 PA2_D5 PA2_D6 PA2_D7 PA2_D8 PA2_D9 PA3_D1 PA3_D2 PA3_D3 PA3_D4 PA3_D5 PA3_D6 PA3_D7 PA3_D8 PA3_D9 PA4_D1 PA4_D2 PA4_D3 PA4_D4 PA4_D5 PA4_D6 PA4_D7 PA4_D8 PA4_D9 PA5_D1 PA5_D2 PA5_D3 PA5_D4 PA5_D5 PA5_D6 PA5_D7 PA5_D8 PA5_D9 PA6_D1 PA6_D2 PA6_D3 PA6_D4 PA6_D5 PA6_D6 PA6_D7 PA6_D8 PA6_D9 PA7_D1 PA7_D2 PA7_D3 PA7_D4 PA7_D5 PA7_D6 PA7_D7 PA7_D8 PA7_D9 PA8_D1 PA8_D2 PA8_D3 PA8_D4 PA8_D5 PA8_D6 PA8_D7 PA8_D8 PA8_D9: Package=SCHOTTKY_DIODE_B120-FDICT-ND, DeviceName=SCHOTTKY_DIODE_B120-FDICT-ND, DeviceSetName=SCHOTTKY_DIODE_B120-FDICT-ND, GateName_1=G$1, LibraryName=Solar_Fadi, SymbolName_1=SCHOTTKY_DIODE_B120-FDICT-ND
PA1_P1 PA2_P1 PA3_P1 PA4_P1 PA5_P1 PA6_P1 PA7_P1 PA8_P1: "Header, 2-Pin", LatestRevisionDate=17-Jul-2002, LatestRevisionNote="Re-released for DXP Platform.", Publisher="Altium Limited"

## Via types
v1: diameter 27.56, hole 13.78, Top Layer to Bottom Layer, 184 vias

## Nets (pads, with @x,y where several pads share a name; then routed paths per layer and width w, separated by ;. In a path a pad name is that pad's centre, name@x,y a point inside that pad or via, vN(x,y) a via of type N, cw(c..) or ccw(c..) an arc to the next point about the centre after c; other vN are vias at no path point)
GND: PA1_D1.POS PA1_S1.NEG PA2_D1.POS PA2_S1.NEG PA3_D1.POS PA3_S1.NEG PA4_D1.POS PA4_S1.NEG PA5_D1.POS PA5_S1.NEG PA6_D1.POS PA6_S1.NEG PA7_D1.POS PA7_S1.NEG PA8_D1.POS PA8_S1.NEG | length 1822.5
  Top Layer w10: PA7_S1.NEG@2072.43,9364.96 2087.11,9350.27 2205.5,9350.27 v1@2210.22,9355 ; PA5_S1.NEG@2074.43,7239.96 2089.11,7225.27 2207.5,7225.27 v1@2212.22,7230 ; PA1_S1.NEG@2077.43,2989.96 2092.11,2975.28 2210.5,2975.28 v1@2215.22,2980 ; PA3_S1.NEG@2077.43,5114.96 2092.11,5100.27 2210.5,5100.27 v1@2215.22,5105 ; v1@2672,7520 2676.72,7524.73 2795.11,7524.73 PA8_S1.NEG@2809.8,7510.04 ; v1@2673,3270 2677.72,3274.72 2796.11,3274.72 PA4_S1.NEG@2810.8,3260.04 ; v1@2675,1145 2679.72,1149.72 2798.11,1149.72 PA2_S1.NEG@2812.8,1135.04 ; v1@2675,5395 2679.72,5399.73 2798.11,5399.73 PA6_S1.NEG@2812.8,5385.04
  Top Layer w20: PA7_S1.NEG@2110.22,9360 PA7_S1.NEG@2115.2,9364.98 ; PA5_S1.NEG@2112.22,7235 PA5_S1.NEG@2117.2,7239.98 ; PA1_S1.NEG@2115.22,2985 PA1_S1.NEG@2120.2,2989.98 ; PA3_S1.NEG@2115.22,5110 PA3_S1.NEG@2120.2,5114.98 ; PA8_S1.NEG@2767.02,7510.02 PA8_S1.NEG@2772,7515 ; PA4_S1.NEG@2768.02,3260.02 PA4_S1.NEG@2773,3265 ; PA2_S1.NEG@2770.02,1135.02 PA2_S1.NEG@2775,1140 ; PA6_S1.NEG@2770.02,5385.02 PA6_S1.NEG@2775,5390
  Bottom Layer w10: PA7_D1.POS@2210.22,9270.07 v1@2210.22,9345 ; PA5_D1.POS@2212.22,7145.07 v1@2212.22,7220 ; PA1_D1.POS@2215.22,2895.07 v1@2215.22,2970 ; PA3_D1.POS@2215.22,5020.07 v1@2215.22,5095 ; v1@2672,7530 PA8_D1.POS@2672,7604.93 ; v1@2673,3280 PA4_D1.POS@2673,3354.93 ; v1@2675,1155 PA2_D1.POS@2675,1229.93 ; v1@2675,5405 PA6_D1.POS@2675,5479.93
  other v1: 2675,1150 2215.22,2975 2673,3275 2215.22,5100 2675,5400 2212.22,7225 2672,7525 2210.22,9350
NetPA1_D1_NEG: PA1_D1.NEG PA1_D2.POS PA1_S1.POS PA1_S2.NEG PA1_TP1.PAD | length 1451.6
  Top Layer w10: PA1_S2.NEG@1765.22,3000 PA1_S2.NEG@1789.95,2975.28 ; PA1_S2.NEG@1790.22,3000 1815.22,2975 1890.22,2975 v1(1935.22,2930) 2015.22,2850 2015.22,2825 ; 2090.22,2450 2111.45,2428.78 2486.45,2428.78 2553.03,2362.2 PA1_TP1.PAD@2553.03,2335.04 ; 2115.22,2675 2115.22,2750
  Bottom Layer w10: PA1_D2.POS@1865.22,2800 1865.22,2860 v1(1935.22,2930) 2090.22,2775 PA1_D1.NEG@2215.22,2775
NetPA1_D2_NEG: PA1_D2.NEG PA1_D3.POS PA1_S2.POS PA1_S3.NEG PA1_TP2.PAD | length 1639.5
  Top Layer w10: PA1_S3.NEG@1465.22,3000 PA1_S3.NEG@1489.95,2975.28 ; PA1_S3.NEG@1515.22,2975 1540.22,2975 v1(1590.22,2925) 1665.22,2850 ; 1790.22,2375 1815.22,2375 v1(1915.22,2275) ; 1790.22,2675 PA1_S2.POS@1790.22,2812.8 ; v1(2465.22,2400) 2478.03,2387.2 PA1_TP2.PAD@2478.03,2335.04
  Bottom Layer w10: PA1_D3.POS@1540.22,2800 1540.22,2875 v1(1590.22,2925) 1715.22,2800 PA1_D2.NEG@1745.15,2800 ; PA1_D2.NEG@1717.39,2777.44 1714.95,2775 PA1_D2.NEG@1745.15,2775 ; v1(1915.22,2275) 2115.22,2275 2289,2448.78 2416.45,2448.78 v1(2465.22,2400)
NetPA1_D3_NEG: PA1_D3.NEG PA1_D4.POS PA1_S3.POS PA1_S4.NEG PA1_TP3.PAD | length 2319.3
  Top Layer w10: PA1_S4.NEG@1150.22,2995 PA1_S4.NEG@1155.22,2990 ; PA1_S4.NEG@1165.22,2975 1215.22,2975 v1(1240.22,2950) 1340.22,2850 ; 1465.22,2550 1465.22,2350 v1(1590.22,2225) ; 1465.22,2675 PA1_S3.POS@1465.22,2812.8 ; v1(2390.22,2400) 2403.03,2387.2 PA1_TP3.PAD@2403.03,2335.04
  Bottom Layer w10: PA1_D4.POS@1190.22,2525 1390.22,2725 PA1_D3.NEG@1390.22,2800 ; v1@1244.57,2950 v1(1240.22,2950) 1260.58,2929.65 1264.92,2929.65 1394.57,2800 PA1_D3.NEG@1420.15,2800 ; v1(1590.22,2225) 2099.52,2225 2303.3,2428.78 2361.45,2428.78 v1(2390.22,2400)
NetPA1_D4_NEG: PA1_D4.NEG PA1_D5.POS PA1_S4.POS PA1_S5.NEG PA1_TP4.PAD | length 3714.4
  Top Layer w10: 1040.22,2025 1040.22,2100 ; 1140.22,2675 1140.22,2325 v1(1265.22,2200) ; 1215.22,2350 v1(1285.22,2280) 1305.22,2260 1305.22,1925 1324.26,1905.96 1324.97,1905.96 1344,1886.92 1344,1863.08 1305.22,1824.3 v1(1305.22,1225) ; PA1_S5.NEG@1245.22,1135 v1(1305.22,1135) ; v1(2315.22,2400) 2328.03,2387.2 PA1_TP4.PAD@2328.03,2335.04 PA1_TP4.PAD@2322.28,2340.78
  Bottom Layer w10: PA1_D5.POS@1190.22,1529.93 1295.22,1424.93 1295.22,1235 v1(1305.22,1225) v1(1305.22,1135) ; PA1_D4.NEG@1190.22,2404.93 1190.22,2379.34 1195.88,2385 1209,2385 1285.22,2308.78 v1(1285.22,2280) ; v1(1265.22,2200) 1290.22,2175 2090.22,2175 v1(2315.22,2400)
NetPA1_D5_NEG: PA1_D5.NEG PA1_D6.POS PA1_S5.POS PA1_S6.NEG PA1_TP5.PAD | length 2416.1
  Top Layer w10: 1140.22,1450 1140.22,1700 v1(1315.22,1875) ; 1240.22,1275 1276.45,1238.78 1276.45,1213.08 1339.52,1150 PA1_S6.NEG@1415.22,1150 ; v1(2315.22,2175) 2328.03,2187.8 PA1_TP5.PAD@2328.03,2260.04
  Bottom Layer w10: PA1_D5.NEG@1190.22,1650 1190.22,1750 v1(1315.22,1875) 1599.52,1875 1628.3,1903.78 2044,1903.78 v1(2315.22,2175) ; v1(1355.22,1155) 1392.39,1192.17 PA1_D6.POS@1392.39,1325
NetPA1_D6_NEG: PA1_D6.NEG PA1_D7.POS PA1_S6.POS PA1_S7.NEG PA1_TP6.PAD | length 1880.5
  Top Layer w10: 1440.22,1650 1527.43,1650 1598.02,1720.59 1598.02,1812.8 v1(1650.22,1865) ; 1590.22,1275 v1(1665.22,1200) 1715.22,1150 PA1_S7.NEG@1740.22,1150 ; v1(2390.22,2175) 2403.03,2187.8 PA1_TP6.PAD@2403.03,2260.04
  Bottom Layer w10: PA1_D6.NEG@1512.46,1325 1538.06,1325 1642.7,1220.35 1644.87,1220.35 v1(1665.22,1200) 1668.58,1203.36 1693.58,1203.36 1715.22,1225 1715.22,1320.07 PA1_D7.POS@1720.15,1325 ; v1(1650.22,1865) 2080.22,1865 v1(2390.22,2175)
NetPA1_D7_NEG: PA1_D7.NEG PA1_D8.POS PA1_S7.POS PA1_S8.NEG PA1_TP7.PAD | length 1649.1
  Top Layer w10: 1790.22,1550 1923.02,1682.8 1923.02,1782.8 v1(1965.22,1825) ; 1915.22,1275 v1(1990.22,1200) 2040.22,1150 PA1_S8.NEG@2065.22,1150 ; v1(2465.22,2175) 2478.03,2187.8 PA1_TP7.PAD@2478.03,2260.04
  Bottom Layer w10: PA1_D7.NEG@1840.22,1325 1865.82,1325 1969.87,1220.94 1969.87,1220.35 v1(1990.22,1200) 2015.22,1200 2040.22,1225 2040.22,1320.07 PA1_D8.POS@2045.15,1325 ; v1(1965.22,1825) 2115.22,1825 v1(2465.22,2175)
NetPA1_D8_NEG: PA1_D8.NEG PA1_D9.POS PA1_S8.POS PA1_TP8.PAD | length 1357.1
  Top Layer w10: 2115.22,1650 2129.93,1635.3 ; 2190.22,1575 2129.93,1635.3 ; 2215.22,1275 2267.99,1275 v1(2290.22,1252.76) v1@2290.22,1250 ; PA1_TP8.PAD@2553.03,2260.04 2553.03,2212.8 2440.22,2100 2221.08,2100 2215.22,2094.14 2215.22,1720.59 2129.93,1635.3
  Bottom Layer w10: PA1_D8.NEG@2167.39,1322.83 PA1_D8.NEG@2165.22,1325 2315.22,1325 2315.22,1277.76 v1(2290.22,1252.76)
NetPA1_D9_NEG: PA1_D9.NEG PA1_P1.1 | length 117.7
  Bottom Layer w20: PA1_D9.NEG@2327.72,1462.5 PA1_D9.NEG@2315.22,1450 PA1_P1.1@2415.22,1450
NetPA2_D1_NEG: PA2_D1.NEG PA2_D2.POS PA2_S1.POS PA2_S2.NEG PA2_TP1.PAD | length 1601.6
  Top Layer w10: PA2_TP1.PAD@2337.2,1789.96 2337.2,1762.8 2403.78,1696.22 2778.78,1696.22 2800,1675 ; 2675.22,1325 2675.22,1400 ; 2875,1300 2875,1275 v1(2955,1195) 3000,1150 3075,1150 PA2_S2.NEG@3100,1125 ; PA2_S2.NEG@3100.28,1149.72 PA2_S2.NEG@3125,1125 ; 2775,1375 2775,1450 2775,1375
  Bottom Layer w10: PA2_D1.NEG@2675,1350 2800,1350 v1(2955,1195) 3025,1265 PA2_D2.POS@3025,1325